# EAGLE board input_switch2_bad (EAGLE 6.5.0)
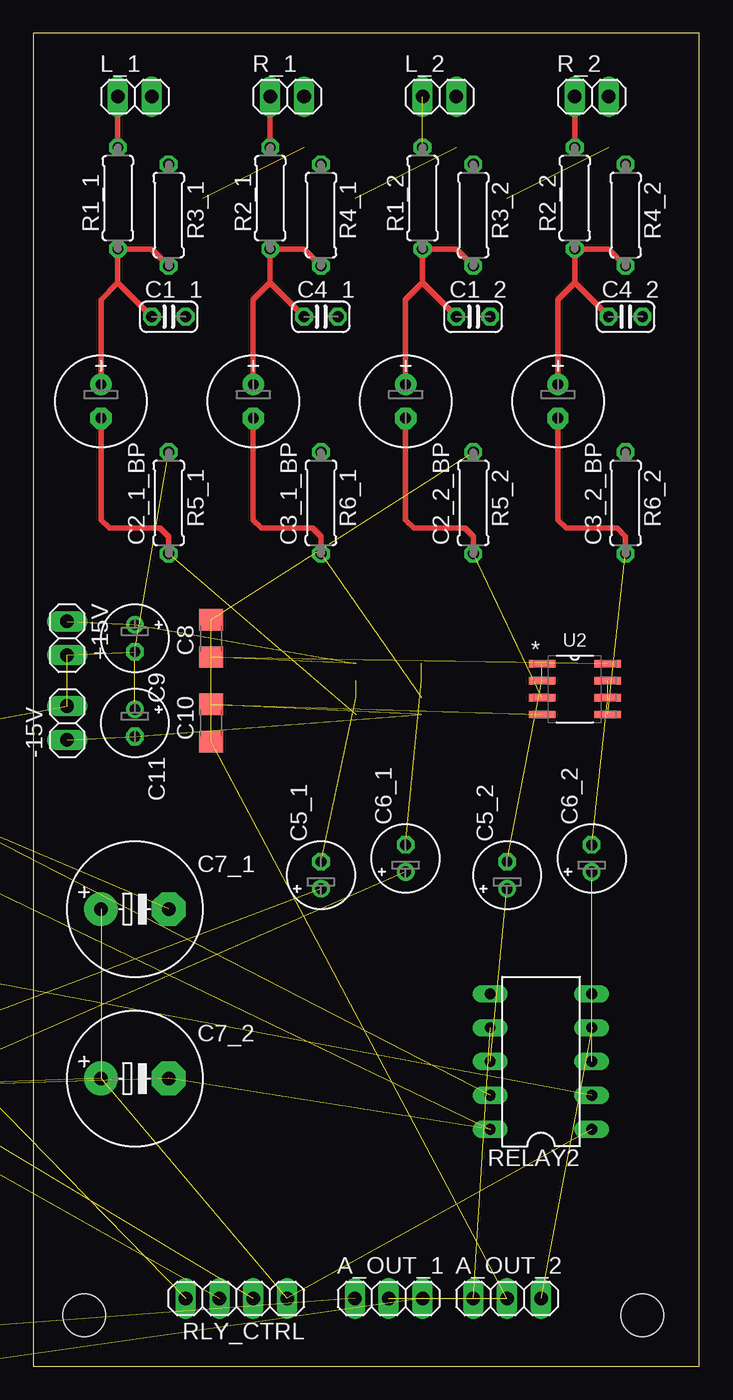
[diagram p0: board, top side]
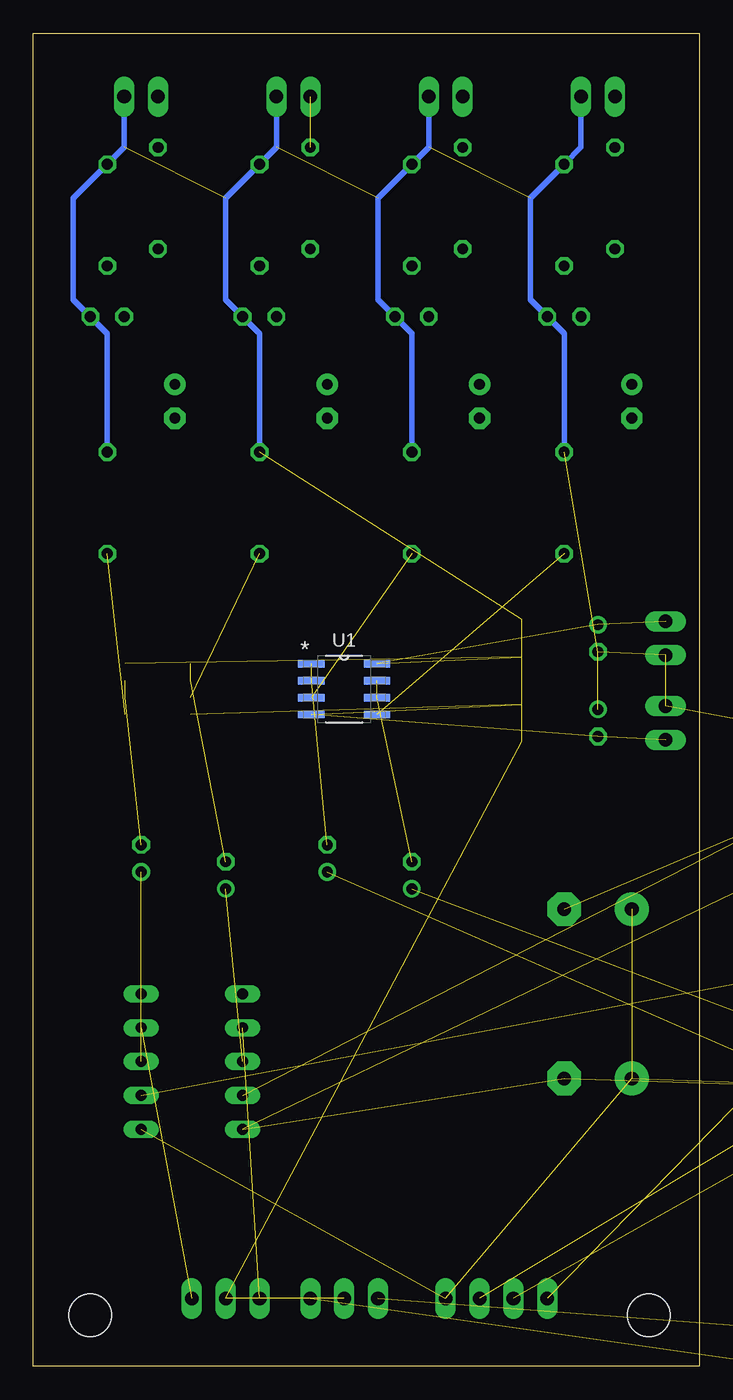
[diagram p1: board, bottom side, seen from below]

Size 50 x 100 mm. Coordinates in mm from the lower left corner, seen from the top.
Outline: 0,0 50,0 50,100 0,100 0,0
Copper layers (1*16): Top 0.035mm / dielectric 1.5mm / Bottom 0.035mm
Design rules "default": minimum track width 10mil, minimum drill 24mil, track to track 8mil, track to pad 8mil, pad to pad 8mil, via to via 8mil, smd to smd 8mil, copper to edge 40mil, drill to drill 8mil, minimum pad ring 10mil, minimum via ring 8mil, stop-mask expansion 4mil, vias tented up to drill 0mil, thermal gap 10mil
Holes 3.2 mm at 3.81,3.81 45.72,3.81

## Footprints (pad centres in the part's own frame; a part is rotated, then mirrored left to right if it is on the bottom)
1X02 = drill 1.016 long: 1 -1.27,0; 2 1.27,0
1X03 = drill 1.016 long: 1 -2.54,0; 2 0,0; 3 2.54,0
C025-024X044 = drill 0.813 octagon: 1 -1.27,0; 2 1.27,0
E2,5-7 = drill 0.813 pad 1.6: + -1.27,0 | drill 0.813 pad 1.6 octagon: - 1.27,0
E2-5 = drill 0.813 pad 1.27: + -1.016,0 | drill 0.813 pad 1.27 octagon: - 1.016,0
E5-10,5 = drill 1.016 pad 2.54: + -2.54,0 | drill 1.016 pad 2.54 octagon: - 2.54,0
C1206 = smd 1.6 x 1.8: 1 -1.4,0; 2 1.4,0
SMB = smd 2.4 x 2.4: A 2.2,0; C -2.2,0
SOT23 = smd 1 x 1.4: 1 -0.95,-1.1; 2 0.95,-1.1; 3 0,1.1
0207/7 = drill 0.813 octagon: 1 -3.81,0; 2 3.81,0
R1206 = smd 1.6 x 1.803: 1 -1.422,0; 2 1.422,0
DIL10 = drill 0.813 long: 1 -5.08,-3.81; 2 -2.54,-3.81; 3 0,-3.81; 4 2.54,-3.81; 5 5.08,-3.81; 6 5.08,3.81; 7 2.54,3.81; 8 0,3.81; 9 -2.54,3.81; 10 -5.08,3.81
1X04 = drill 1.016 long: 1 -3.81,0; 2 -1.27,0; 3 1.27,0; 4 3.81,0
SOIC127P600X175-8N = smd 1.981 x 0.559: 1 -2.464,1.905; 2 -2.464,0.635; 3 -2.464,-0.635; 4 -2.464,-1.905; 5 2.464,-1.905; 6 2.464,-0.635; 7 2.464,0.635; 8 2.464,1.905
DIP254P762X508-8 = drill 0.838 square: 1 -7.62,7.62 | drill 0.838: 2 -7.62,5.08; 3 -7.62,2.54; 4 -7.62,0; 5 0,0; 6 0,2.54; 7 0,5.08; 8 0,7.62

## Placement (x,y rotation side)
+15V  [1X02]  2.54,54.61 270 top
-15V  [1X02]  2.54,48.26 90 top
A_OUT_1  [1X03]  26.67,5.08 0 top
A_OUT_2  [1X03]  35.56,5.08 0 top
C1_1  220p  [C025-024X044]  10.16,78.74 0 top
C1_2  220p  [C025-024X044]  33.02,78.74 0 top
C2_1_BP  10u  [E2,5-7]  5.08,72.39 270 top
C2_2_BP  10u  [E2,5-7]  27.94,72.39 270 top
C3_1_BP  10u  [E2,5-7]  16.51,72.39 270 top
C3_2_BP  10u  [E2,5-7]  39.37,72.39 270 top
C4_1  220p  [C025-024X044]  21.59,78.74 0 top
C4_2  220p  [C025-024X044]  44.45,78.74 0 top
C5_1  47u  [E2-5]  21.59,36.83 90 top
C5_2  47u  [E2-5]  35.56,36.83 90 top
C6_1  47u  [E2-5]  27.94,38.1 90 top
C6_2  47u  [E2-5]  41.91,38.1 90 top
C7_1  220u  [E5-10,5]  7.62,34.29 0 top
C7_2  220u  [E5-10,5]  7.62,21.59 0 top
C8  [C1206]  13.34,54.61 90 top
C9  [E2-5]  7.62,54.61 270 top
C10  [C1206]  13.34,48.26 90 top
C11  [E2-5]  7.62,48.26 270 top
D1  ES2D  [SMB]  -63.5,19.05 0 top  (outside the outline)
D2  ES2D  [SMB]  -71.12,19.05 0 top  (outside the outline)
L_1  [1X02]  7.62,95.25 0 top
L_2  [1X02]  30.48,95.25 0 top
Q1  [SOT23]  -34.29,52.07 0 top  (outside the outline)
Q2  [SOT23]  -39.37,52.07 0 top  (outside the outline)
R1_1  100  [0207/7]  6.35,87.63 90 top
R1_2  100  [0207/7]  29.21,87.63 90 top
R2_1  100  [0207/7]  17.78,87.63 90 top
R2_2  100  [0207/7]  40.64,87.63 90 top
R3_1  220k  [0207/7]  10.16,86.36 270 top
R3_2  220k  [0207/7]  33.02,86.36 270 top
R4_1  220k  [0207/7]  21.59,86.36 270 top
R4_2  220k  [0207/7]  44.45,86.36 270 top
R5_1  100k  [0207/7]  10.16,64.77 270 top
R5_2  100k  [0207/7]  33.02,64.77 270 top
R6_1  100k  [0207/7]  21.59,64.77 270 top
R6_2  100k  [0207/7]  44.45,64.77 270 top
R7_1  100  [R1206]  -41.91,39.37 0 top  (outside the outline)
R7_2  100  [R1206]  -48.26,39.37 0 top  (outside the outline)
R8_1  220k  [R1206]  -54.61,39.37 0 top  (outside the outline)
R8_2  220k  [R1206]  -60.96,39.37 0 top  (outside the outline)
R9_1  220k  [R1206]  -67.31,39.37 0 top  (outside the outline)
R9_2  220k  [R1206]  -16.51,45.72 0 top  (outside the outline)
R_1  [1X02]  19.05,95.25 0 top
R_2  [1X02]  41.91,95.25 0 top
RELAY1  [DIL10]  -80.01,-6.35 0 top  (outside the outline)
RELAY2  [DIL10]  38.1,22.86 90 top
RLY_CTRL  [1X04]  15.24,5.08 180 top
U1  NE5532AD8G  [SOIC127P600X175-8N]  26.67,50.8 0 bottom
U2  NE5532AD8G  [SOIC127P600X175-8N]  40.64,50.8 0 top
U3  NE5532P  [DIP254P762X508-8]  -80.01,6.35 0 top  (outside the outline)

## Library data of the parts
+15V -15V A_OUT_1 A_OUT_2 L_1 L_2 R_1 R_2 RLY_CTRL = pinhead
C1_1 C1_2 C2_1_BP C2_2_BP C3_1_BP C3_2_BP C4_1 C4_2 C5_1 C5_2 C6_1 C6_2 C7_1 C7_2 C8-C11 R1_1 R1_2 R2_1 R2_2 R3_1 R3_2 R4_1 R4_2 R5_1 R5_2 R6_1 R6_2 R7_1 R7_2 R8_1 R8_2 R9_1 R9_2 = rcl
D1 D2 = diode
Q1 Q2 = semicon-smd-ipc
RELAY1 RELAY2 = ic-package
U1 U2 = ne5532; MPN: NE5532AD8G; OC_FARNELL: 1426379; OC_NEWARK: 42K2208; PACKAGE: SOIC-8; SUPPLIER: ON Semiconductor
U3 = ne5532; MPN: NE5532P; OC_FARNELL: 1106092; OC_NEWARK: 59K8751; PACKAGE: PDIP; SUPPLIER: Texas Instruments

## Nets
+15V: +15V.1 C8.1 C9.+ U1.8 U2.8
-15V: -15V.1 C10.2 C11.- U1.4 U2.4
GND: +15V.2 -15V.2 A_OUT_1.2 A_OUT_2.2 C1_1.2 C1_2.2 C4_1.2 C4_2.2 C8.2 C9.- C10.1 C11.+ L_1.2 L_2.2 R3_1.1 R3_2.1 R4_1.1 R4_2.1 R5_1.1 R5_2.1 R6_1.1 R6_2.1 R8_1.1 R8_2.1 R9_1.1 R9_2.1 R_1.2 R_2.2
N$1: R2_1.2 R_1.1
N$2: L_1.1 R1_1.2
N$3: C1_1.1 C2_1_BP.+ R1_1.1 R3_1.2
N$4: C2_1_BP.- R5_1.2 U1.5
N$5: C5_1.- U1.6 U1.7
N$6: C3_1_BP.+ C4_1.1 R2_1.1 R4_1.2
N$7: C6_1.- U1.1 U1.2
N$8: C6_1.+ RELAY1.3
N$9: A_OUT_1.3 RELAY1.4
N$10: C6_2.- U2.6 U2.7
N$11: R8_1.2 RELAY1.2
N$12: R9_1.2 RELAY1.9
N$13: C5_2.- U2.1 U2.2
N$14: A_OUT_1.1 RELAY1.7
N$15: R7_1.2 RLY_CTRL.2
N$16: Q1.1 R7_1.1
N$18: C7_1.- D1.A Q1.3 RELAY1.10
N$19: A_OUT_2.1 RELAY2.7
N$20: C3_1_BP.- R6_1.2 U1.3
N$21: R2_2.2 R_2.1
N$22: L_2.1 R1_2.2
N$23: C1_2.1 C2_2_BP.+ R1_2.1 R3_2.2
N$24: C3_2_BP.+ C4_2.1 R2_2.1 R4_2.2
N$26: C3_2_BP.- R6_2.2 U2.5
N$27: C2_2_BP.- R5_2.2 U2.3
N$28: A_OUT_2.3 RELAY2.4
N$29: C6_2.+ RELAY2.3
N$30: C5_2.+ RELAY2.8
N$31: C5_1.+ RELAY1.8
N$32: R7_2.2 RLY_CTRL.3
N$34: R8_2.2 RELAY2.2
N$35: R9_2.2 RELAY2.9
N$37: C7_1.+ C7_2.+ D1.C D2.C RELAY1.1 RELAY2.1 RLY_CTRL.1
N$38: C7_2.- D2.A Q2.3 RELAY2.10
N$39: Q2.1 R7_2.1
N$40: Q1.2 Q2.2 RLY_CTRL.4
VCC+: U3.8
VCC-: U3.4

## Tracks (layer width: path | path; a pad name or v marks a point on that pad's centre or on a via)
+15V  (4 unrouted)
-15V  (4 unrouted)
GND  (15 unrouted)
  Bottom 0.406: L_1.2 8.89,91.44 R3_1.1 12.7,87.63 12.7,80.01 C1_1.2 10.16,77.47 R5_1.1 | R_1.2 20.32,91.44 R4_1.1 24.13,87.63 24.13,80.01 C4_1.2 21.59,77.47 R6_1.1 | L_2.2 31.75,91.44 R3_2.1 35.56,87.63 35.56,80.01 C1_2.2 33.02,77.47 R5_2.1 | R_2.2 43.18,91.44 R4_2.1 46.99,87.63 46.99,80.01 C4_2.2 44.45,77.47 R6_2.1
N$1
  Top 0.406: R_1.1 R2_1.2
N$2
  Top 0.406: L_1.1 R1_1.2
N$3
  Top 0.406: 6.35,81.28 R1_1.1 8.89,83.82 R3_1.2 | 6.35,81.28 5.08,80.01 C2_1_BP.+ | C1_1.1 6.35,81.28
N$4  (1 unrouted)
  Top 0.406: C2_1_BP.- 5.08,63.5 5.71,62.87 9.53,62.87 10.16,62.23 R5_1.2
N$5  (2 unrouted)
N$6
  Top 0.406: 17.78,81.28 R2_1.1 20.32,83.82 R4_1.2 | 17.78,81.28 16.51,80.01 C3_1_BP.+ | C4_1.1 17.78,81.28
N$7  (2 unrouted)
N$8  (1 unrouted)
N$9  (1 unrouted)
N$10  (2 unrouted)
N$11  (1 unrouted)
N$12  (1 unrouted)
N$13  (2 unrouted)
N$14  (1 unrouted)
N$15  (1 unrouted)
N$16  (1 unrouted)
N$18  (3 unrouted)
N$19  (1 unrouted)
N$20  (1 unrouted)
  Top 0.406: C3_1_BP.- 16.51,63.5 17.14,62.87 20.95,62.87 21.59,62.23 R6_1.2
N$21
  Top 0.406: R_2.1 R2_2.2
N$22  (1 unrouted)
N$23
  Top 0.406: 29.21,81.28 R1_2.1 31.75,83.82 R3_2.2 | 29.21,81.28 27.94,80.01 C2_2_BP.+ | C1_2.1 29.21,81.28
N$24
  Top 0.406: 40.64,81.28 R2_2.1 43.18,83.82 R4_2.2 | 40.64,81.28 39.37,80.01 C3_2_BP.+ | C4_2.1 40.64,81.28
N$26  (1 unrouted)
  Top 0.406: C3_2_BP.- 39.37,63.5 40.01,62.87 43.81,62.87 44.45,62.23 R6_2.2
N$27  (1 unrouted)
  Top 0.406: C2_2_BP.- 27.94,63.5 28.57,62.87 32.38,62.87 33.02,62.23 R5_2.2
N$28  (1 unrouted)
N$29  (1 unrouted)
N$30  (1 unrouted)
N$31  (1 unrouted)
N$32  (1 unrouted)
N$34  (1 unrouted)
N$35  (1 unrouted)
N$37  (6 unrouted)
N$38  (3 unrouted)
N$39  (1 unrouted)
N$40  (2 unrouted)